# Altium PCB controlo_rev4.PcbDoc
Units mm, origin at the board's own origin, x right, y up, seen from the top; angles counter-clockwise.
Board outline 100.08 x 99.8 mm, 2 copper layers (Top Layer, Bottom Layer); 111 components, 133 nets, 412 pads, 259 vias.
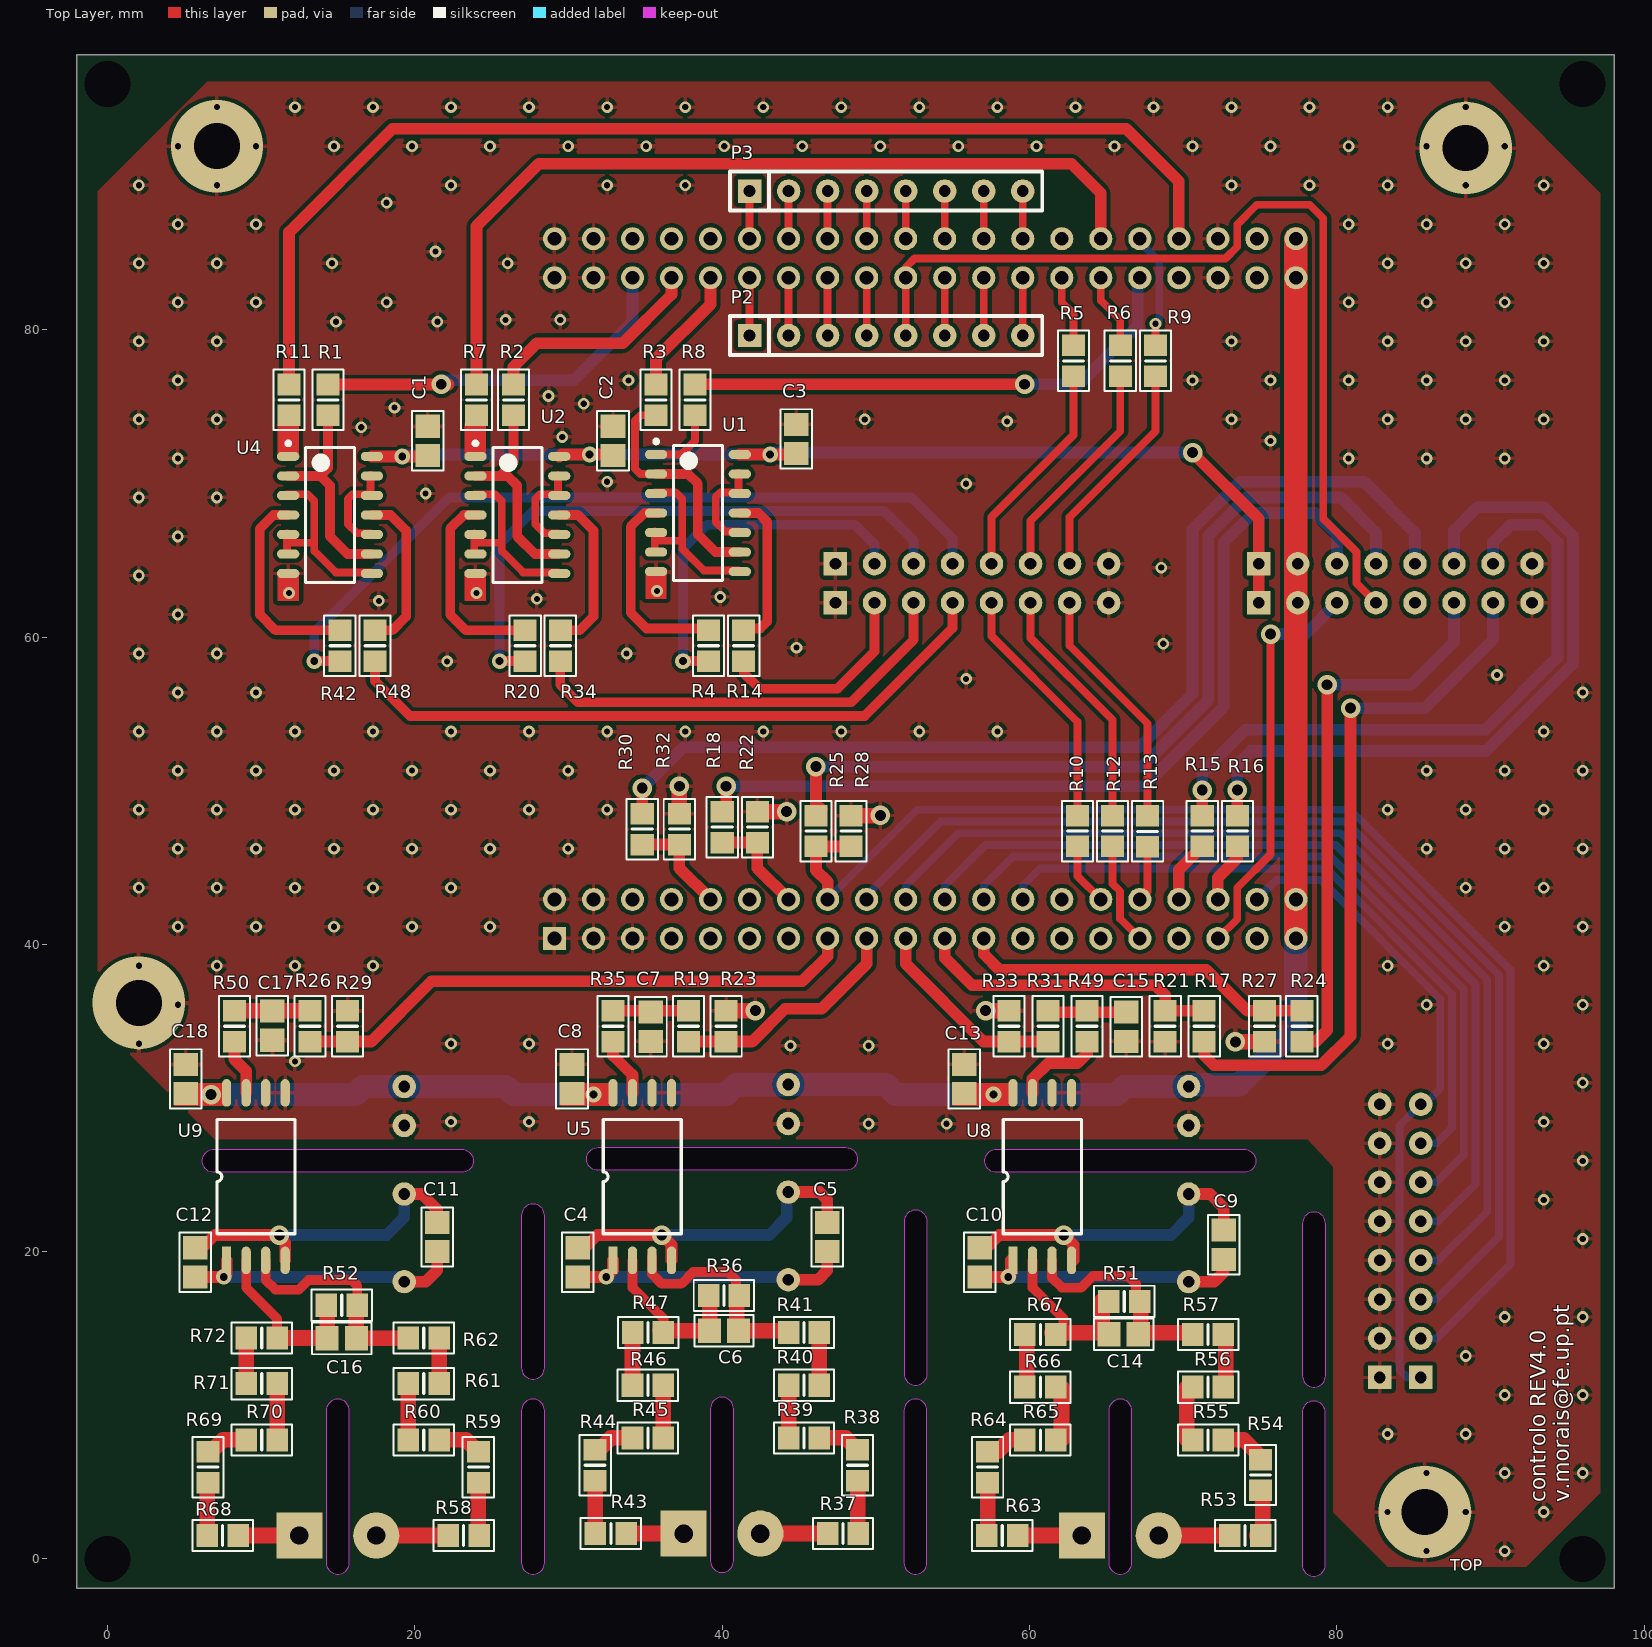
[diagram p0: Top Layer view]
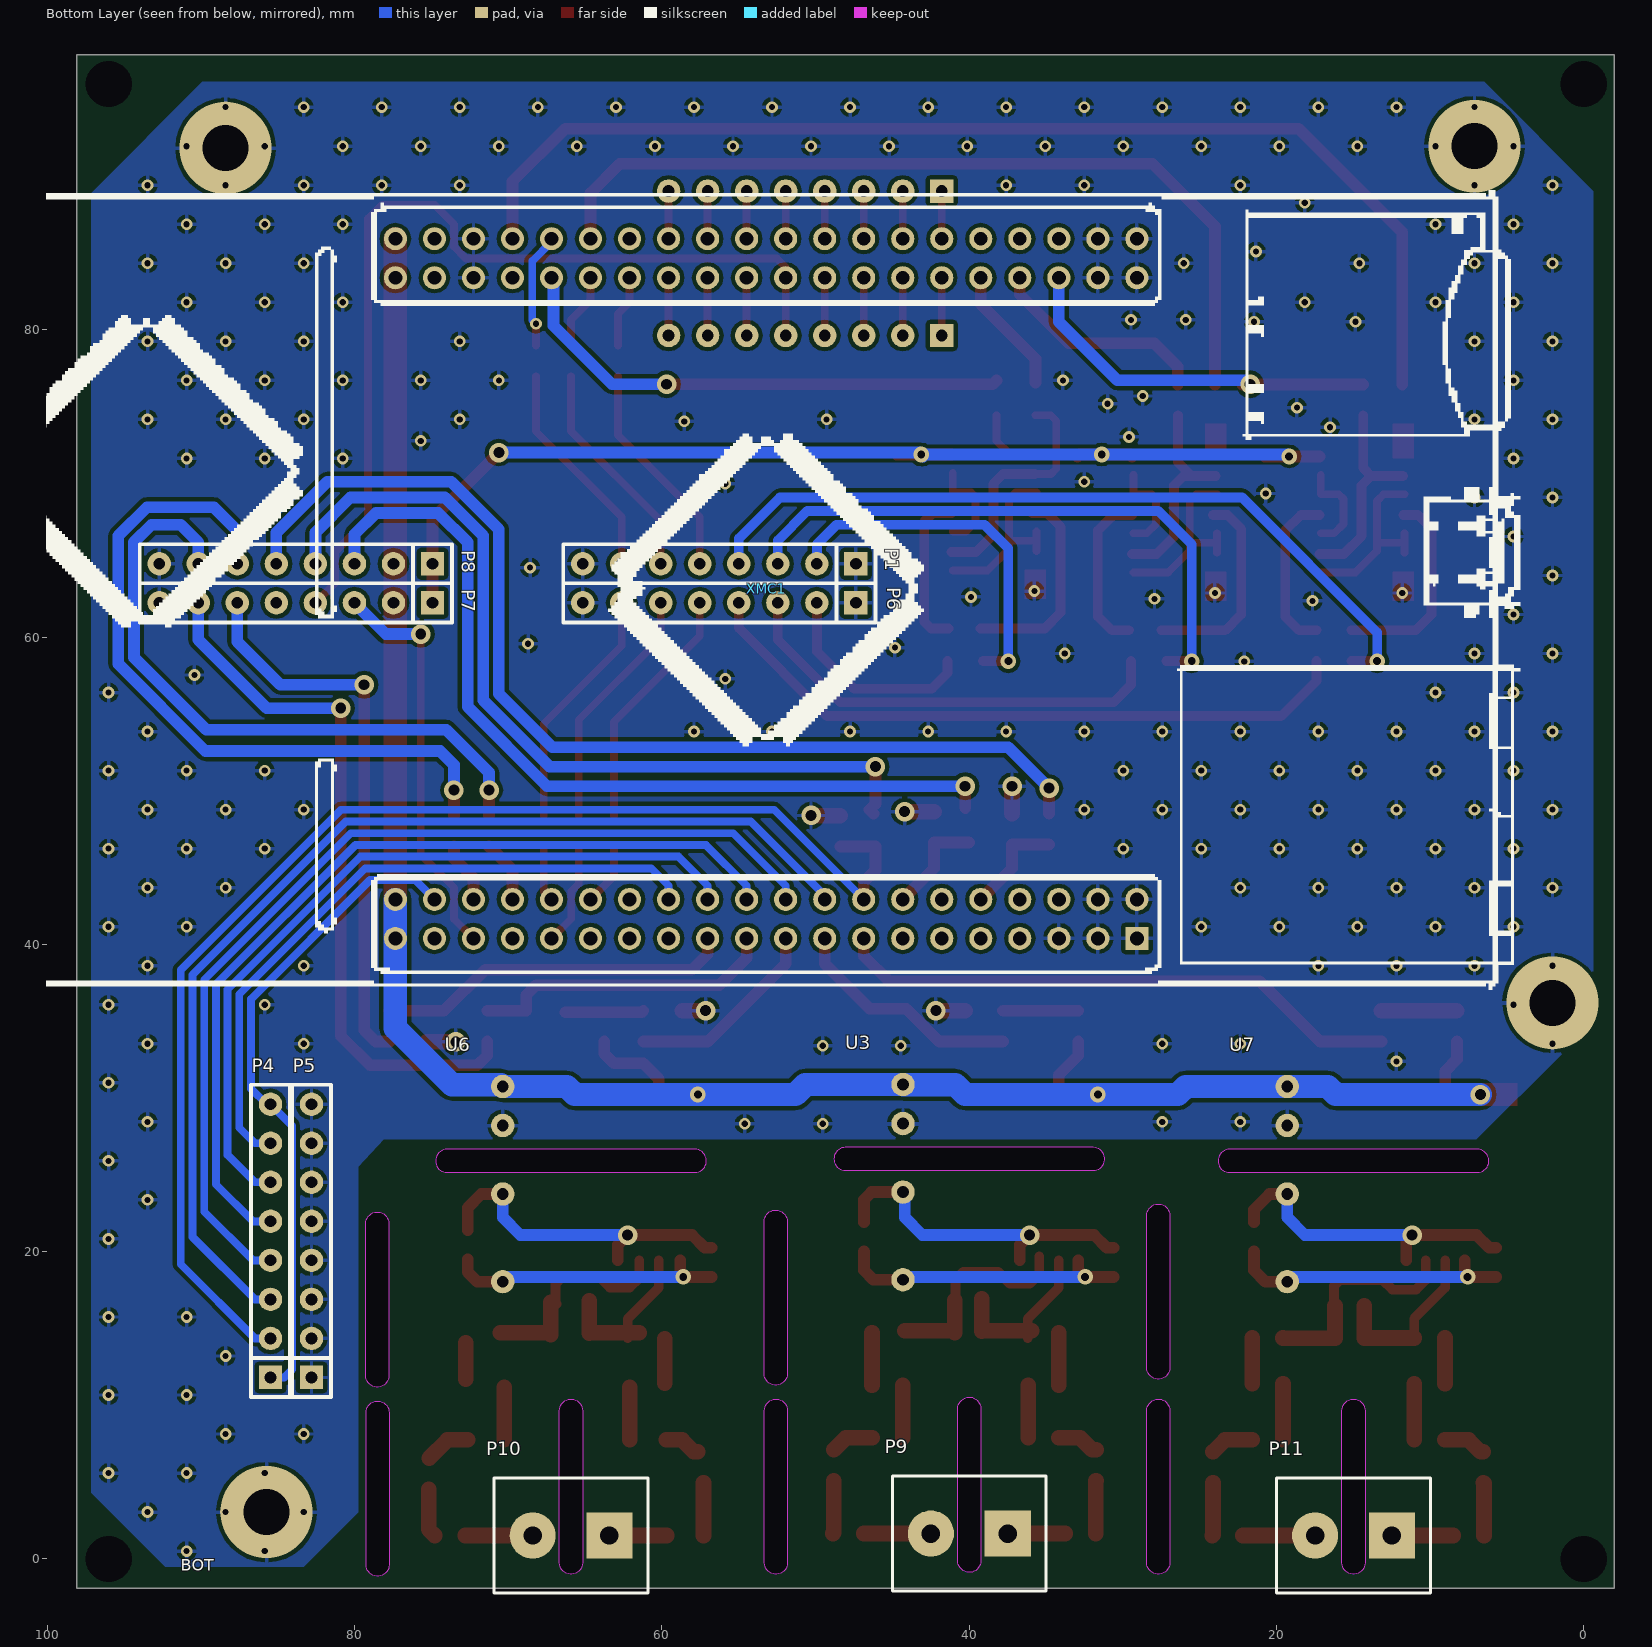
[diagram p1: Bottom Layer view, seen from below]

## Layer stack, top to bottom
Top Solder: solder mask 0.0102, Solder Resist, Dk 3.5
Top Layer: signal copper 0.0356
Dielectric 1: dielectric 0.32, FR-4, Dk 4.8
Bottom Layer: signal copper 0.0356
Bottom Solder: solder mask 0.0102, Solder Resist, Dk 3.5

## Board outline
-2,-1.905 20.447,-1.905 81.788,-1.905 98.075,-1.905 98.075,97.892 81.788,97.892 20.447,97.892 -2,97.892
cut-out: 14.236,-0.254 ccw(c14.986,-0.254) 15.736,-0.254 15.736,9.652 ccw(c14.986,9.652) 14.236,9.652
cut-out: 6.921,25.158 cw(c6.921,25.908) 6.921,26.658 23.051,26.658 cw(c23.051,25.908) 23.801,25.908 cw(c23.051,25.908) 23.051,25.158
cut-out: 26.936,12.446 ccw(c27.686,12.446) 28.436,12.446 28.436,22.352 ccw(c27.686,22.352) 26.936,22.352
cut-out: 26.936,-0.254 ccw(c27.686,-0.254) 28.436,-0.254 28.436,9.652 ccw(c27.686,9.652) 26.936,9.652
cut-out: 31.924,25.285 cw(c31.924,26.035) 31.924,26.785 48.053,26.785 cw(c48.053,26.035) 48.804,26.035 cw(c48.053,26.035) 48.053,25.285
cut-out: 39.239,-0.127 ccw(c39.989,-0.127) 40.739,-0.127 40.739,9.779 ccw(c39.989,9.779) 39.239,9.779
cut-out: 51.844,12.05 ccw(c52.594,12.05) 53.344,12.05 53.344,21.956 ccw(c52.594,21.956) 51.844,21.956
cut-out: 51.828,-0.254 ccw(c52.578,-0.254) 53.328,-0.254 53.328,9.652 ccw(c52.578,9.652) 51.828,9.652
cut-out: 57.848,25.158 cw(c57.848,25.908) 57.848,26.658 73.977,26.658 cw(c73.977,25.908) 74.728,25.908 cw(c73.977,25.908) 73.977,25.158
cut-out: 65.163,-0.254 ccw(c65.913,-0.254) 66.663,-0.254 66.663,9.652 ccw(c65.913,9.652) 65.163,9.652
cut-out: 77.768,11.923 ccw(c78.518,11.923) 79.268,11.923 79.268,21.829 ccw(c78.518,21.829) 77.768,21.829
cut-out: 77.752,-0.381 ccw(c78.502,-0.381) 79.252,-0.381 79.252,9.525 ccw(c78.502,9.525) 77.752,9.525

## Design rules (kind name [scope] priority, off if disabled: settings)
Clearance [All] p1: gap=0.254 ignorepadtopadclearanceinfootprint=FALSE
Height [All] p1: minheight=0 maxheight=254 prefheight=12.7
HoleSize [All] p1: absolutevalues=TRUE maxlimit=25.4 minlimit=0.025 maxpercent=80.000 minpercent=20.000
PlaneClearance [All] p1: clearance=2.54
PolygonConnect [All] p1: connectstyle=Relief reliefconductorwidth=0.254 reliefentries=4 polygonreliefangle="90 Angle" airgapwidth=0.254
RoutingVias [All] p1: holewidth=0.711 width=1.27 viastyle="Through Hole" minholewidth=0.711 minwidth=1.27 maxholewidth=0.711 maxwidth=1.27
SilkToSilkClearance [All] p1: silktosilkclearance=0.025
SilkToSolderMaskClearance [IsPad] p1: minsilkscreentomaskgap=0.025 clearancetoexposedcopper=TRUE
SolderMaskExpansion [All] p1: expansion=0.102
Width [All] p1: maxlimit=3.81 minlimit=0.254 preferedwidth=0.762
25 further rules are at their usual default settings.

## Components (designator, comment, footprint, x,y, rotation, side; value= is the part's Value field where it differs from the comment)
C1 "C 10uF 0805 MLCC 25V X5R" CAPC_0805 20.828,72.771 r270 top
C2 "C 10uF 0805 MLCC 25V X5R" CAPC_0805 32.893,72.771 r270 top
C3 "C 10uF 0805 MLCC 25V X5R" CAPC_0805 44.831,72.898 r270 top
C4 "C 10uF 0805 MLCC 25V X5R" CAPC_0805 30.607,19.304 r270 top
C5 "C 10uF 0805 MLCC 25V X5R" CAPC_0805 46.847,20.955 r270 top
C6 "C 1uF 0805 MLCC 50V X5R" CAPC_0805 40.116,14.859 r180 top
C7 "C 10nF 0805 MLCC 50V X7R" CAPC_0805 35.362,34.635 r90 top
C8 "C 10uF 0805 MLCC 25V X5R" CAPC_0805 30.226,31.242 r270 top
C9 "C 10uF 0805 MLCC 25V X5R" CAPC_0805 72.644,20.447 r270 top
C10 "C 10uF 0805 MLCC 25V X5R" CAPC_0805 56.769,19.304 r270 top
C11 "C 10uF 0805 MLCC 25V X5R" CAPC_0805 21.463,20.955 r270 top
C12 "C 10uF 0805 MLCC 25V X5R" CAPC_0805 5.715,19.304 r270 top
C13 "C 10uF 0805 MLCC 25V X5R" CAPC_0805 55.753,31.242 r270 top
C14 "C 1uF 0805 MLCC 50V X5R" CAPC_0805 66.131,14.619 r180 top
C15 "C 10nF 0805 MLCC 50V X7R" CAPC_0805 66.294,34.635 r90 top
C16 "C 1uF 0805 MLCC 50V X5R" CAPC_0805 15.24,14.351 r180 top
C17 "C 10nF 0805 MLCC 50V X7R" CAPC_0805 10.724,34.707 r90 top
C18 "C 10uF 0805 MLCC 25V X5R" CAPC_0805 5.08,31.242 r270 top
P1 "P 8p 2.54 SR DW 8P" "Header 8x1 8.5mm" 47.371,64.77 r0 bottom locked
P2 "P 8p 2.54 SR DW 8P" "Header 8x1 8.5mm" 41.783,79.629 r0 top
P3 "P 8p 2.54 SR DW 8P" "Header 8x1 8.5mm" 41.783,89.027 r0 top
P4 "P 8p 2.54 SR DW 8P" "Header 8x1 8.5mm" 85.471,11.811 r90 bottom
P5 "P 8p 2.54 SR DW 8P" "Header 8x1 8.5mm" 82.804,11.811 r90 bottom
P6 "P 8p 2.54 SR DW 8P" "Header 8x1 8.5mm" 47.371,62.23 r0 bottom locked
P7 "P 8p 2.54 SR DW 8P" "Header 8x1 8.5mm" 74.93,62.23 r0 bottom locked
P8 "P 8p 2.54 SR DW 8P" "Header 8x1 8.5mm" 74.93,64.77 r0 bottom locked
P9 "P 2p 5mm" connector1x2_parafuso 39.989,1.651 r0 bottom
P10 "P 2p 5mm" connector1x2_parafuso 65.913,1.524 r0 bottom
P11 "P 2p 5mm" connector1x2_parafuso 14.986,1.524 r0 bottom
R1 "R 0 1/8W 0805" RESC_0805 14.351,75.438 r90 top
R2 "R 0 1/8W 0805" RESC_0805 26.416,75.438 r90 top
R3 "R 0 1/8W 0805" RESC_0805 35.687,75.438 r90 top
R4 "R 0 1/8W 0805" RESC_0805 39.116,59.436 r270 top
R5 "R 0 1/8W 0805" RESC_0805 62.865,77.978 r90 top
R6 "R 0 1/8W 0805" RESC_0805 65.913,77.978 r90 top
R7 "R 0 1/8W 0805" RESC_0805 24.003,75.438 r270 top
R8 "R 0 1/8W 0805" RESC_0805 38.227,75.438 r90 top
R9 "R 0 1/8W 0805" RESC_0805 68.199,77.978 r90 top
R10 "R 0 1/8W 0805" RESC_0805 63.119,47.371 r90 top
R11 "R 0 1/8W 0805" RESC_0805 11.811,75.438 r270 top
R12 "R 0 1/8W 0805" RESC_0805 65.405,47.371 r270 top
R13 "R 0 1/8W 0805" RESC_0805 67.691,47.355 r90 top
R14 "R 0 1/8W 0805" RESC_0805 41.402,59.436 r270 top
R15 "R 0 1/8W 0805" RESC_0805 71.247,47.371 r90 top
R16 "R 0 1/8W 0805" RESC_0805 73.533,47.371 r90 top
R17 "R 5k1 1/8W 0805 .1%" RESC_0805 71.374,34.671 r270 top
R18 "R 5k1 1/8W 0805 .1%" RESC_0805 40.005,47.625 r90 top
R19 "R 5k1 1/8W 0805 .1%" RESC_0805 37.804,34.671 r90 top
R20 "R 0 1/8W 0805" RESC_0805 27.178,59.436 r270 top
R21 "R 7k5 1/8W 0805 .1%" RESC_0805 68.834,34.671 r90 top
R22 "R 7k5 1/8W 0805 .1%" RESC_0805 42.291,47.625 r270 top
R23 "R 7k5 1/8W 0805 .1%" RESC_0805 40.259,34.671 r270 top
R24 "R 5k1 1/8W 0805 .1%" RESC_0805 77.724,34.671 r270 top
R25 "R 5k1 1/8W 0805 .1%" RESC_0805 46.101,47.371 r90 top
R26 "R 5k1 1/8W 0805 .1%" RESC_0805 13.166,34.671 r90 top
R27 "R 7k5 1/8W 0805 .1%" RESC_0805 75.311,34.671 r90 top
R28 "R 7k5 1/8W 0805 .1%" RESC_0805 48.387,47.371 r270 top
R29 "R 7k5 1/8W 0805 .1%" RESC_0805 15.621,34.671 r270 top
R30 "R 5k1 1/8W 0805 .1%" RESC_0805 34.798,47.498 r90 top
R31 "R 5k1 1/8W 0805 .1%" RESC_0805 61.209,34.671 r90 top
R32 "R 7k5 1/8W 0805 .1%" RESC_0805 37.211,47.498 r270 top
R33 "R 7k5 1/8W 0805 .1%" RESC_0805 58.674,34.671 r270 top
R34 "R 0 1/8W 0805" RESC_0805 29.464,59.436 r270 top
R35 "R 330 1/8 0805 .1%" RESC_0805 32.893,34.671 r90 top
R36 "R 560 1/8W 0805 .1%" RESC_0805 40.116,17.145 r180 top
R37 "R 100k 1/8W 0805 .1%" RESC_0805 47.863,1.651 r0 top
R38 "R 100k 1/8W 0805 .1%" RESC_0805 48.813,6.096 r90 top
R39 "R 100k 1/8W 0805 .1%" RESC_0805 45.323,7.874 r180 top
R40 "R 100k 1/8W 0805 .1%" RESC_0805 45.323,11.303 r0 top
R41 "R 100k 1/8W 0805 .1%" RESC_0805 45.323,14.732 r180 top
R42 "R 0 1/8W 0805" RESC_0805 15.113,59.436 r270 top
R43 "R 100k 1/8W 0805 .1%" RESC_0805 32.75,1.651 r180 top
R44 "R 100k 1/8W 0805 .1%" RESC_0805 31.734,6.096 r90 top
R45 "R 100k 1/8W 0805 .1%" RESC_0805 35.163,7.874 r0 top
R46 "R 100k 1/8W 0805 .1%" RESC_0805 35.163,11.303 r180 top
R47 "R 100k 1/8W 0805 .1%" RESC_0805 35.179,14.732 r0 top
R48 "R 0 1/8W 0805" RESC_0805 17.399,59.436 r270 top
R49 "R 330 1/8 0805 .1%" RESC_0805 63.745,34.671 r90 top
R50 "R 330 1/8 0805 .1%" RESC_0805 8.255,34.671 r90 top
R51 "R 560 1/8W 0805 .1%" RESC_0805 66.167,16.764 r180 top
R52 "R 560 1/8W 0805 .1%" RESC_0805 15.24,16.51 r180 top
R53 "R 100k 1/8W 0805 .1%" RESC_0805 74.041,1.524 r0 top
R54 "R 100k 1/8W 0805 .1%" RESC_0805 75.041,5.461 r90 top
R55 "R 100k 1/8W 0805 .1%" RESC_0805 71.628,7.747 r180 top
R56 "R 100k 1/8W 0805 .1%" RESC_0805 71.628,11.176 r0 top
R57 "R 100k 1/8W 0805 .1%" RESC_0805 71.628,14.605 r180 top
R58 "R 100k 1/8W 0805 .1%" RESC_0805 23.176,1.524 r0 top
R59 "R 100k 1/8W 0805 .1%" RESC_0805 24.126,5.969 r90 top
R60 "R 100k 1/8W 0805 .1%" RESC_0805 20.574,7.747 r180 top
R61 "R 100k 1/8W 0805 .1%" RESC_0805 20.574,11.403 r0 top
R62 "R 100k 1/8W 0805 .1%" RESC_0805 20.574,14.378 r180 top
R63 "R 100k 1/8W 0805 .1%" RESC_0805 58.227,1.524 r180 top
R64 "R 100k 1/8W 0805 .1%" RESC_0805 57.277,5.969 r90 top
R65 "R 100k 1/8W 0805 .1%" RESC_0805 60.706,7.747 r0 top
R66 "R 100k 1/8W 0805 .1%" RESC_0805 60.706,11.176 r180 top
R67 "R 100k 1/8W 0805 .1%" RESC_0805 60.706,14.605 r0 top
R68 "R 100k 1/8W 0805 .1%" RESC_0805 7.489,1.524 r180 top
R69 "R 100k 1/8W 0805 .1%" RESC_0805 6.539,5.969 r90 top
R70 "R 100k 1/8W 0805 .1%" RESC_0805 10.033,7.747 r0 top
R71 "R 100k 1/8W 0805 .1%" RESC_0805 10.033,11.403 r180 top
R72 "R 100k 1/8W 0805 .1%" RESC_0805 10.033,14.378 r0 top
U1 "IC NAND HEF4011" SOIC-14N 38.423,68.072 r0 top
U2 "IC NAND HEF4011" SOIC-14N 26.67,67.945 r0 top
U3 "IC CC/CC 1W 5V" DC/DC_ISO 44.307,30.876 r270 bottom
U4 "IC NAND HEF4011" SOIC-14N 14.478,67.945 r0 top
U5 "IC AmpIso BIPOL AMC1200" SOIC8 32.893,19.431 r90 top
U6 "IC CC/CC 1W 5V" DC/DC_ISO 70.358,30.749 r270 bottom
U7 "IC CC/CC 1W 5V" DC/DC_ISO 19.304,30.749 r270 bottom
U8 "IC AmpIso BIPOL AMC1200" SOIC8 58.928,19.431 r90 top
U9 "IC AmpIso BIPOL AMC1200" SOIC8 7.747,19.431 r90 top
XMC1 "IC XMC4500 Relax LITE" XMC4500 53.213,63.156 r270 bottom locked

## Footprints (in the part's own frame and the unit in brackets; to place one, negate y for a bottom-side part, rotate by r counter-clockwise, add the part's x,y. Pads: shape width x height; smd on the part's side, far side on the other; paste and mask are expansions set on the pad)
CAPC_0805 [mm] "Chip Capacitor, Body 2.0x1.3mm, IPC Low Density"
  rect 1.5x1.6 smd: 1(-0.95,0) 2(0.95,0)
  silkscreen extent -1.93,-1.03 1.93,1.03, body extent -1.1,-0.72 1.1,0.72, height 1.1
connector1x2_parafuso [mm] "Connector; Header; 2 Position"
  rect 3x3 hole 1.2: 1(-2.5,0)
  round 3 hole 1.2: 2(2.5,0)
  silkscreen extent -5,-3.75 5,3.75, body extent -4.92,-4.53 5.68,4.47, height 14.6
DC/DC_ISO [mil]
  round 60 hole 30: 1(0,0) 2(100,0) 3(275.59,0) 4(500,0)
  body extent -54,-149 572,80, height 315
"Header 8x1 8.5mm" [mil] "Stackable 8 pin header"
  rect 60x60 hole 30: 1(0,0)
  round 60 hole 30: 2(100,0) 3(200,0) 4(300,0) 5(400,0) 6(500,0) 7(600,0) 8(700,0)
  silkscreen extent -50,-50 750,50, body extent -50,-50 750,50, height 335
RESC_0805 [mm] "Chip Resistor, Body 2.0x1.3mm, IPC Low Density"
  rect 1.4x1.5 smd: 1(-1,0) 2(1,0)
  silkscreen extent -1.96,-1.01 1.96,1.01, body extent -1.07,-0.7 1.08,0.7, height 0.65
SOIC8 [mm]
  rect 1.8x0.6 smd: 1(0,0)
  oval 1.8x0.6 smd: 2(0,-1.27) 3(0,-2.54) 4(0,-3.81) 5(10.9,-3.81) 6(10.9,-2.54) 7(10.9,-1.27) 8(10.9,0)
  silkscreen extent 1.73,-4.44 9.17,0.64, body extent 1.7,-4.52 9.22,0.69, height 3
SOIC-14N [mm] "SOIC, 14-Leads, Body 8,65x3,90mm, Pitch 1,27mm, IPC Medium Density"
  oval 1.45x0.6 smd: 1(-2.725,3.81) 2(-2.725,2.54) 3(-2.725,1.27) 4(-2.725,0) 5(-2.725,-1.27) 6(-2.725,-2.54) 7(-2.725,-3.81) 8(2.725,-3.81) 9(2.725,-2.54) 10(2.725,-1.27) 11(2.725,0) 12(2.725,1.27) 13(2.725,2.54) 14(2.725,3.81)
  silkscreen extent -2.85,-4.4 1.6,4.78, body extent -2,-4.4 2,4.4, height 1.75
XMC4500 [mm]
  rect 1.5x1.5 hole 0.9: 1(22.77,24.13)
  round 1.5 hole 0.9: 2(22.77,21.59) 3(22.77,19.05) 4(22.77,16.51) 5(22.77,13.97) 6(22.77,11.43) 7(22.77,8.89) 8(22.77,6.35) 9(22.77,3.81) 10(22.77,1.27) 11(22.77,-1.27) 12(22.77,-3.81) 13(22.77,-6.35) 14(22.77,-8.89) 15(22.77,-11.43) 16(22.77,-13.97) 17(22.77,-16.51) 18(22.77,-19.05) 19(22.77,-21.59) 20(22.77,-24.13) 21(20.23,-24.13) 22(20.23,-21.59) 23(20.23,-19.05) 24(20.23,-16.51) 25(20.23,-13.97) 26(20.23,-11.43) 27(20.23,-8.89) 28(20.23,-6.35) 29(20.23,-3.81) 30(20.23,-1.27) 31(20.23,1.27) 32(20.23,3.81) 33(20.23,6.35) 34(20.23,8.89) 35(20.23,11.43) 36(20.23,13.97) 37(20.23,16.51) 38(20.23,19.05) 39(20.23,21.59) 40(20.23,24.13) 41(-20.23,24.13) 42(-20.23,21.59) 43(-20.23,19.05) 44(-20.23,16.51) 45(-20.23,13.97) 46(-20.23,11.43) 47(-20.23,8.89) 48(-20.23,6.35) 49(-20.23,3.81) 50(-20.23,1.27) 51(-20.23,-1.27) 52(-20.23,-3.81) 53(-20.23,-6.35) 54(-20.23,-8.89) 55(-20.23,-11.43) 56(-20.23,-13.97) 57(-20.23,-16.51) 58(-20.23,-19.05) 59(-20.23,-21.59) 60(-20.23,-24.13) 61(-22.77,-24.13) 62(-22.77,-21.59) 63(-22.77,-19.05) 64(-22.77,-16.51) 65(-22.77,-13.97) 66(-22.77,-11.43) 67(-22.77,-8.89) 68(-22.77,-6.35) 69(-22.77,-3.81) 70(-22.77,-1.27) 71(-22.77,1.27) 72(-22.77,3.81) 73(-22.77,6.35) 74(-22.77,8.89) 75(-22.77,11.43) 76(-22.77,13.97) 77(-22.77,16.51) 78(-22.77,19.05) 79(-22.77,21.59) 80(-22.77,24.13)
  silkscreen extent -25.92,-53.34 26.1,49.07, body extent -24.04,-25.4 24.04,25.4, height 8.5

## Part data
C1 C2 C3 C4 C5 C8 C9 C10 C11 C12 C13 C18: library part "Capacitor SMD", "Capacitores de cerâmica multicamada MLCC - SMD/SMT 10uF 25V X5R +/-10% 0805 Gen Purp", LCSC PART #=C15850, Mouser VPN=963-TMK212BBJ106KG-T, Price=0,162
C6 C14 C16: library part "Capacitor SMD", "Capacitores de cerâmica multicamada MLCC - SMD/SMT 0805 50V 1uF 20% X5R", LCSC PART #=C28323, Mouser VPN=963-UMK212BJ105MG-T, Price=0,153
C7 C15 C17: library part "Capacitor SMD", "Capacitores de cerâmica multicamada MLCC - SMD/SMT 10nF 50V X7R 10%", LCSC PART #=C1710, Mouser VPN=603-CC805KRX7R9BB103, Price=0,099
P1 P2 P3 P4 P5 P6 P7 P8: library part jumper_8p, "Distribuidores e Alojamento de Fios CGrid Hrd SRDW THo le 8ckt", Mouser VPN=538-87937-0800, Price=0,621
P9 P10 P11: library part gen_purpose_conn_1x2, "Bloques de terminales de PCB de perfil estándar RS de 5,0 mm", Price=0,24, RS VPN=896-6696
R1 R2 R3 R4 R5 R6 R7 R8 R9 R10 R11 R12 R13 R14 R15 R16 R20 R34 R42 R48: library part Resistor, "Resistores de Filme Espesso - SMD 1/8Watt 0ohms Commercial Use", LCSC PART #=C17477, Mouser VPN=71-CRCW08050000Z0EAC, Price=0,09
R17 R18 R19 R24 R25 R26 R30 R31: library part Resistor, "Resistores de Filme Fino - SMD 0805 5.1Kohm 1/8W .1% 25ppm", LCSC PART #=C27834, Mouser VPN=667-ERA-6AEB512V, Price=0,324
R21 R22 R23 R27 R28 R29 R32 R33: library part Resistor, "Resistores de Filme Fino - SMD 7.5K OHM .1% 25ppm", LCSC PART #=C17807, Mouser VPN=66-PCF08C7.5KB, Price=0,135
R35 R49 R50: library part Resistor, "Resistores de Filme Fino - SMD CPF 0805 330R 0.1% 25PPM 1K RL", LCSC PART #=C17630, Mouser VPN=279-CPF0805B330RE1, Price=0,126
R36 R51 R52: library part Resistor, "Resistores de Filme Fino - SMD 1/8W 3.6K ohm .1% 25ppm", LCSC PART #=C28636, Mouser VPN=667-ERJ-PB6B5600V, Price=0,324
R37 R38 R39 R40 R41 R43 R44 R45 R46 R47 R53 R54 R55 R56 R57 R58 R59 R60 R61 R62 R63 R64 R65 R66 R67 R68 R69 R70 R71 R72: library part Resistor, "Resistores de Filme Fino - SMD 100 Kohm .1% 0805 25PPM", LCSC PART #=C17407, Mouser VPN=284-APC0805B100KN, Price=0,126
U1 U2 U4: library part HEF4011, "Portas lógicas QUADRUPLE 2-INPUT NAND GATE", LCSC PART #=C6725, Mouser VPN=771-HEF4011BTD-T, Price=0,296
U3 U6 U7: library part DC/DC_ISO, "Conversores CC/CC com isolação 1W 5Vin 5Vout 200mA SIP7", Mouser VPN=919-RFB-0505S, Price=1,4
U5 U8 U9: library part AMC1200, "Amplificadores de isolamento 4kV peak Iso Amp", LCSC PART #=C79905, Mouser VPN=595-AMC1200BDWVR, Price=4,62
XMC1: library part XMC4500, "\"  KIT_XMC45_RELAX_LITE_V1 -  Evaluation Board, XMC4500 MCU, Detachable On-Board Debugger, USB Powered \"", Farnell VPN=2443552, Price=14,628, RS VPN=251-8418

## Free pads (board coordinates)
  round 1.524 hole 3 unplated: 4(0,0) 4(0,96) 4(96,0) 4(96,96)

## Via types
v1: diameter 0.762, hole 0.4, Top Layer to Bottom Layer, 223 vias
v2: diameter 1.27, hole 0.711, Top Layer to Bottom Layer, 21 vias
v3: diameter 1.016, hole 0.508, Top Layer to Bottom Layer, 11 vias
v4: diameter 6, hole 3, Top Layer to Bottom Layer, 4 vias

## Nets (pads, with @x,y where several pads share a name; then routed paths per layer and width w, separated by ;. In a path a pad name is that pad's centre, name@x,y a point inside that pad or via, vN(x,y) a via of type N, cw(c..) or ccw(c..) an arc to the next point about the centre after c; other vN are vias at no path point)
3V3: C1.2 C2.2 C3.2 P7.1 P8.1 U1.14 U2.14 U4.14 | length 74.3
  Top Layer w0.762: U4.14 v3(19.177,71.755) 20.762,71.755 C1.2 ; U2.14 29.522,71.882 v3(31.369,71.882) 32.827,71.882 32.954,71.755 C2.2@33.02,71.821 ; U1.14 v3(43.122,71.882) 44.707,71.882 C3.2@44.773,71.948 ; v2(70.612,72.009) 74.93,67.691 P8.1 P7.1
  Bottom Layer w0.762: v3(19.177,71.755) 19.304,71.882 v3(31.369,71.882) 42.868,71.882 42.995,71.755 v3(43.122,71.882) 43.249,72.009 v2(70.612,72.009)
3V3GND: C1.1 C2.1 C3.1 C7.1 C8.1 C13.1 C15.1 C17.1 C18.1 P1.1 P1.8 P5.1 P5.2 P5.3 P5.4 P5.5 P5.6 P5.7 P5.8 P6.1 P6.8 P7.8 P8.8 R21.1 R22.1 R23.1 R27.1 R28.1 R29.1 R32.1 R33.1 U1.7 U2.7 U3.2 U4.7 U5.5 U5.6 U6.2 U7.2 U8.5 U8.6 U9.5 U9.6 XMC1.1 XMC1.2 XMC1.3 XMC1.39 XMC1.40 XMC1.41 XMC1.42 XMC1.58 XMC1.63 XMC1.79 XMC1.80 | length 10.9
  Top Layer w1.016: R32.1 v2(37.211,50.292) ; R23.1 42.148,35.671 v2(42.164,35.687) ; R22.1 v2@44.18,48.625 ; R28.1 v2@50.276,48.371 ; v2(57.15,35.687) 57.166,35.671 R33.1 ; v2(73.406,33.655) 73.422,33.671 R27.1
  other v1: 85.852,0.508 90.932,0.508 83.312,3.048 88.392,3.048 93.472,3.048 85.852,5.588 90.932,5.588 96.012,5.588 83.312,8.128 88.392,8.128 90.932,10.668 96.012,10.668 88.392,13.208 90.932,15.748 96.012,15.748 96.012,20.828 93.472,23.368 96.012,25.908 49.53,28.321 54.61,28.321 22.352,28.448 27.432,28.448 93.472,28.448 96.012,30.988 12.192,32.385 44.45,33.401 49.53,33.401 2.032,33.528 22.352,33.528 27.432,33.528 83.312,33.528 93.472,33.528 4.572,36.068 85.852,36.068 96.012,36.068 2.032,38.608 7.112,38.608 12.192,38.608 17.272,38.608 83.312,38.608 93.472,38.608 4.572,41.148 9.652,41.148 14.732,41.148 19.812,41.148 24.892,41.148 90.932,41.148 96.012,41.148 2.032,43.688 7.112,43.688 12.192,43.688 17.272,43.688 22.352,43.688 88.392,43.688 93.472,43.688 4.572,46.228 9.652,46.228 14.732,46.228 19.812,46.228 24.892,46.228 29.972,46.228 85.852,46.228 90.932,46.228 96.012,46.228 2.032,48.768 7.112,48.768 12.192,48.768 17.272,48.768 22.352,48.768 27.432,48.768 32.512,48.768 83.312,48.768 88.392,48.768 93.472,48.768 4.572,51.308 9.652,51.308 14.732,51.308 19.812,51.308 24.892,51.308 29.972,51.308 85.852,51.308 90.932,51.308 96.012,51.308 2.032,53.848 7.112,53.848 12.192,53.848 17.272,53.848 22.352,53.848 27.432,53.848 32.512,53.848 37.592,53.848 42.672,53.848 47.752,53.848 52.832,53.848 57.912,53.848 93.472,53.848 4.572,56.388 9.652,56.388 96.012,56.388 55.88,57.277 90.424,57.531 22.098,58.42 2.032,58.928 7.112,58.928 33.782,58.928 44.831,59.309 68.707,59.563 4.572,61.468 17.653,62.357 27.94,62.484 39.878,62.611 11.811,62.865 24.003,62.865 35.756,62.992 2.032,64.008 68.58,64.516 4.572,66.548 2.032,69.088 7.112,69.088 20.701,69.342 55.88,69.977 32.512,70.104 4.572,71.628 80.772,71.628 85.852,71.628 90.932,71.628 75.692,72.771 29.591,73.025 16.51,73.66 58.547,74.041 2.032,74.168 7.112,74.168 49.276,74.168 73.152,74.168 83.312,74.168 88.392,74.168 93.472,74.168 18.669,74.93 30.988,75.184 28.702,75.692 4.572,76.708 33.896,76.708 70.612,76.708 75.692,76.708 80.772,76.708 85.852,76.708 90.932,76.708 2.032,79.248 7.112,79.248 73.152,79.248 83.312,79.248 88.392,79.248 93.472,79.248 14.859,80.518 21.463,80.518 25.908,80.645 29.464,80.645 4.572,81.788 9.652,81.788 18.161,81.788 80.772,81.788 85.852,81.788 90.932,81.788 2.032,84.328 7.112,84.328 14.605,84.328 26.035,84.328 83.312,84.328 88.392,84.328 93.472,84.328 21.336,85.09 4.572,86.868 9.652,86.868 80.772,86.868 85.852,86.868 90.932,86.868 18.161,88.265 2.032,89.408 7.112,89.408 22.352,89.408 32.512,89.408 37.592,89.408 73.152,89.408 78.232,89.408 83.312,89.408 88.392,89.408 93.472,89.408 4.572,91.948 9.652,91.948 14.732,91.948 19.812,91.948 24.892,91.948 29.972,91.948 35.052,91.948 40.132,91.948 45.212,91.948 50.292,91.948 55.372,91.948 60.452,91.948 65.532,91.948 70.612,91.948 75.692,91.948 80.772,91.948 85.852,91.948 90.932,91.948 7.112,94.488 12.192,94.488 17.272,94.488 22.352,94.488 27.432,94.488 32.512,94.488 37.592,94.488 42.672,94.488 47.752,94.488 52.832,94.488 57.912,94.488 62.992,94.488 68.072,94.488 73.152,94.488 78.232,94.488 83.312,94.488 88.392,94.488
  other v2: 50.292,48.387 44.196,48.641
  other v4: 85.725,3.048 2.032,36.195 88.392,91.821 7.112,91.948
5V: C8.2 C13.2 C18.2 P7.2 P8.2 U3.1 U5.8 U6.1 U7.1 U8.8 U9.8 XMC1.20 XMC1.21 XMC1.60 XMC1.61 | length 127.3
  Top Layer w1.524: XMC1.20 XMC1.21 XMC1.60 XMC1.61
  Bottom Layer w1.524: v2(6.731,30.226) 16.129,30.226 16.652,30.749 U7.1 25.893,30.749 26.416,30.226 40.259,30.226 40.894,30.861 44.292,30.861 U3.1 50.658,30.876 51.308,30.226 65.659,30.226 66.182,30.749 U6.1 70.47,30.861 73.66,30.861 77.343,34.544 XMC1.20 XMC1.21@77.343,42.914
  other v3: 31.623,30.226 57.658,30.226
ENA_U: R1.1 U4.2 U4.9 | length 13.7
  Top Layer w0.635: U4.2 13.843,70.485 ; R1.1 14.351,70.993 13.843,70.485 ; U4.9 15.621,65.405 14.471,66.555 14.471,69.857 13.843,70.485
ENA_V: R2.1 U2.2 U2.9 | length 15.4
  Top Layer w0.635: R2.1 26.416,71.374 25.527,70.485 U2.2 26.035,70.485 26.663,69.857 26.663,66.555 27.813,65.405 U2.9
ENA_W: R3.1 U1.2 U1.9 | length 15.6
  Top Layer w0.508: R3.1 34.687,74.438 34.328,74.079 34.328,70.955 34.671,70.612 U1.2
  Top Layer w0.635: U1.2 37.788,70.612 38.416,69.984 38.416,66.682 39.566,65.532 U1.9
Gnd1: C9.1 C10.1 U6.3 U8.4 | length 21.8
  Top Layer w0.762: C10.1 57.211,20.254 58.039,21.082 v2@62.103,21.082 ; v2(62.23,21.082) 62.865,20.447 U8.4@62.865,19.431 ; U6.3 71.755,23.749 72.644,22.86 C9.1
  Bottom Layer w0.762: v2(62.23,21.082) 69.215,21.082 70.358,22.225 U6.3
Gnd2: C11.1 C12.1 U7.3 U9.4 | length 20.4
  Top Layer w0.762: C12.1 6.157,20.254 6.985,21.082 v2@11.049,21.082 ; U9.4 11.557,20.574 ; U7.3 20.447,23.749 21.463,22.733 C11.1
  Bottom Layer w0.762: v2(11.176,21.082) 18.161,21.082 19.304,22.225 U7.3
Gnd3: C4.1 C5.1 U3.3 U5.4 | length 21.9
  Top Layer w0.762: C4.1 31.049,20.254 31.877,21.082 v2@35.941,21.082 ; v2(36.068,21.082) 36.703,20.447 U5.4 ; U3.3 46.355,23.876 46.847,23.384 C5.1
  Bottom Layer w0.762: v2(36.068,21.082) 43.053,21.082 44.196,22.225 U3.3@44.196,23.749
I_U: P8.5 R30.2 | length 69.9
  Top Layer w0.762: R30.2 v2(34.798,50.165)
  Bottom Layer w0.762: v2(34.798,50.165) 37.465,52.832 67.143,52.832 70.612,56.301 70.612,67.009 73.707,70.104 81.788,70.104 85.09,66.802 P8.5
I_V: P8.4 R25.2 | length 56.3
  Top Layer w0.762: v2(46.101,51.562) 46.101,49.133 46.482,48.752 R25.2@46.228,48.498
  Bottom Layer w0.762: v2(46.101,51.562) 67.31,51.562 71.628,55.88 71.628,66.588 74.128,69.088 80.264,69.088 82.55,66.802 P8.4
I_W: P8.3 R18.2 | length 57.3
  Top Layer w0.762: R18.2@40.259,48.879 v2(40.259,50.292)
  Bottom Layer w0.762: v2(40.259,50.292) 67.477,50.292 72.644,55.459 72.644,66.167 74.549,68.072 78.613,68.072 80.01,66.675 P8.3
iabc_0: R30.1 R32.2 XMC1.36 | length 6.8
  Top Layer w0.762: R30.1 R32.2 37.211,44.958 XMC1.36
iabc_1: P4.2 R25.1 R28.2 XMC1.33 | length 84.2
  Top Layer w0.762: XMC1.33 46.863,44.069 46.101,44.831 R25.1 R28.2
  Bottom Layer w0.508: XMC1.33 52.693,48.756 80.887,48.756 91.313,38.33 91.313,19.177 86.487,14.351 P4.2
iabc_2: R18.1 R22.2 XMC1.34 | length 6.7
  Top Layer w0.762: R18.1 R22.2 ; R22.2@42.291,46.498 42.291,44.958 XMC1.34
iso_ENA_UH: P1.7 R9.1 | length 14.5
  Top Layer w0.508: P1.7 62.611,67.818 68.199,73.406 R9.1
iso_ENA_UL: P6.7 R13.2 | length 16
  Top Layer w0.508: P6.7 62.611,59.436 67.691,54.356 R13.2
iso_ENA_VH: P1.6 R6.1 | length 14.6
  Top Layer w0.508: P1.6 60.071,67.564 65.913,73.406 R6.1
iso_ENA_VL: P6.6 R12.1 | length 16.1
  Top Layer w0.508: P6.6 60.071,59.944 65.405,54.61 R12.1
iso_ENA_WH: P1.5 R5.1 | length 14.4
  Top Layer w0.508: P1.5 57.531,67.818 62.865,73.152 R5.1
iso_ENA_WL: P6.5 R10.2 | length 16.2
  Top Layer w0.508: P6.5 57.531,60.071 63.119,54.483 R10.2
iso_PWM_UH: P1.4 R42.2 | length 51.5
  Top Layer w0.635: v3(13.446,58.436) R42.2
  Bottom Layer w0.635: v3(13.446,58.436) 13.446,60.309 22.225,69.088 52.324,69.088 54.991,66.421 P1.4
iso_PWM_UL: P6.4 R48.2 | length 43.8
  Top Layer w0.635: R48.2 17.399,57.15 19.685,54.864 49.276,54.864 54.991,60.579 P6.4
iso_PWM_VH: P1.3 R20.2 | length 39.4
  Top Layer w0.635: v3(25.511,58.436) R20.2
  Bottom Layer w0.635: v3(25.511,58.436) 25.511,66.024 27.686,68.199 50.546,68.199 52.451,66.294 P1.3
iso_PWM_VL: P6.3 R34.2 | length 29.1
  Top Layer w0.635: R34.2 29.464,56.896 30.607,55.753 48.387,55.753 52.451,59.817 P6.3
iso_PWM_WH: P1.2 R4.2 | length 23.9
  Top Layer w0.635: v3(37.449,58.436) R4.2
  Bottom Layer w0.635: v3(37.449,58.436) 37.449,65.77 38.989,67.31 48.641,67.31 49.911,66.04 P1.2
iso_PWM_WL: P6.2 R14.2 | length 13.9
  Top Layer w0.635: R14.2 41.402,57.658 42.418,56.642 47.498,56.642 49.911,59.055 P6.2
NetP2_1: P2.1 XMC1.46 | length 3.8
  Top Layer w0.508: P2.1 XMC1.46
NetP2_2: P2.2 XMC1.47 | length 3.8
  Top Layer w0.508: P2.2 XMC1.47
NetP2_3: P2.3 XMC1.48 | length 3.8
  Top Layer w0.508: P2.3 XMC1.48
NetP2_4: P2.4 XMC1.49 | length 3.8
  Top Layer w0.508: P2.4 XMC1.49
NetP2_6: P2.6 XMC1.51 | length 3.8
  Top Layer w0.508: P2.6 XMC1.51
NetP2_7: P2.7 XMC1.52 | length 3.8
  Top Layer w0.508: P2.7 XMC1.52
NetP2_8: P2.8 XMC1.53 | length 3.8
  Top Layer w0.508: P2.8 XMC1.53
NetP3_1: P3.1 XMC1.75 | length 3.1
  Top Layer w0.508: XMC1.75 P3.1
NetP3_2: P3.2 XMC1.74 | length 3.1
  Top Layer w0.508: XMC1.74 P3.2
NetP3_3: P3.3 XMC1.73 | length 3.1
  Top Layer w0.508: XMC1.73 P3.3
NetP3_4: P3.4 XMC1.72 | length 3.1
  Top Layer w0.508: XMC1.72 P3.4
NetP3_5: P3.5 XMC1.71 | length 3.1
  Top Layer w0.508: XMC1.71 P3.5
NetP3_6: P3.6 XMC1.70 | length 3.1
  Top Layer w0.508: XMC1.70 P3.6
NetP3_7: P3.7 XMC1.69 | length 3.1
  Top Layer w0.508: XMC1.69 P3.7
NetP3_8: P3.8 XMC1.68 | length 3.1
  Top Layer w0.508: XMC1.68 P3.8
NetP4_1: P4.1 P4.8 XMC1.22 | length 42.6
  Bottom Layer w0.508: XMC1.22 76.061,44.184 78.993,44.184 86.741,36.436 86.741,30.607 85.725,29.591 P4.8 84.074,28.194 84.074,12.319 84.582,11.811 P4.1
NetP4_3: P4.3 XMC1.32 | length 71.4
  Bottom Layer w0.508: XMC1.32 49.403,43.18 54.217,47.994 80.571,47.994 90.551,38.014 90.551,20.955 86.487,16.891 P4.3
NetP4_4: P4.4 XMC1.31 | length 64.8
  Bottom Layer w0.508: XMC1.31 51.943,43.815 55.36,47.232 80.256,47.232 89.789,37.699 89.789,22.606 86.614,19.431 P4.4
NetP4_5: P4.5 XMC1.30 | length 57.9
  Bottom Layer w0.508: XMC1.30 54.483,43.815 57.138,46.47 79.94,46.47 89.027,37.383 89.027,24.384 86.614,21.971 P4.5
NetP4_6: P4.6 XMC1.29 | length 50.8
  Bottom Layer w0.508: XMC1.29 57.023,43.815 58.916,45.708 79.624,45.708 88.265,37.067 88.265,26.289 86.487,24.511 P4.6
NetP4_7: P4.7 XMC1.28 | length 43.8
  Bottom Layer w0.508: XMC1.28 59.563,43.815 60.694,44.946 79.309,44.946 87.503,36.752 87.503,28.067 86.487,27.051 P4.7
NetP9_1: P9.1 R43.1 | length 3.7
  Top Layer w1.016: R43.1 P9.1
NetP9_2: P9.2 R37.1 | length 4.4
  Top Layer w1.016: P9.2 R37.1
NetP10_1: P10.1 R63.1 | length 3.7
  Top Layer w1.016: R63.1@59.674,1.524 P10.1
NetP10_2: P10.2 R53.1 | length 4.4
  Top Layer w1.016: P10.2 R53.1@72.787,1.524
NetP11_1: P11.1 R68.1 | length 4
  Top Layer w1.016: R68.1 P11.1
NetP11_2: P11.2 R58.1 | length 4.7
  Top Layer w1.016: P11.2 R58.1
NetR1_2: R1.2 XMC1.43 | length 25.4
  Top Layer w0.762: R1.2 22.209,76.438 22.193,76.454 v2(21.717,76.454)
  Bottom Layer w0.762: v2(21.717,76.454) 21.971,76.708 30.353,76.708 34.163,80.518 XMC1.43
NetR2_2: R2.2 XMC1.44 | length 14.5
  Top Layer w0.762: R2.2 26.416,77.597 27.94,79.121 33.528,79.121 36.703,82.296 XMC1.44
NetR3_2: R3.2 XMC1.45 | length 8.3
  Top Layer w0.762: R3.2@35.687,76.565 35.687,78.105 39.243,81.661 XMC1.45
NetR4_1: R4.1 U1.4 | length 13.4
  Top Layer w0.635: U1.4@35.894,68.072 34.936,68.072 34.047,67.183 34.047,61.595 35.079,60.563 R4.1@39.254,60.563
NetR5_2: R5.2 XMC1.54 | length 4.7
  Top Layer w0.508: XMC1.54 62.103,81.788 62.865,81.026 R5.2
NetR6_2: R6.2 XMC1.55 | length 4.9
  Top Layer w0.508: XMC1.55 64.643,81.915 65.913,80.645 R6.2
NetR7_1: R7.1 XMC1.66 | length 56.4
  Top Layer w0.762: R7.1 24.003,86.741 28.067,90.805 62.738,90.805 64.643,88.9 XMC1.66
NetR8_2: R8.2 XMC1.56 | length 33.7
  Top Layer w0.762: R8.2@38.227,76.692 38.465,76.454 v2(59.69,76.454)
  Bottom Layer w0.762: v2(59.69,76.454) 63.246,76.454 67.056,80.264 67.056,83.259 XMC1.56
NetR9_2: R9.2 XMC1.65 | length 7.6
  Top Layer w0.508: R9.2 v1(68.199,80.391)
  Bottom Layer w0.508: XMC1.65 67.183,85.725 68.441,84.467 68.441,80.633 v1(68.199,80.391)
NetR10_1: R10.1 XMC1.26 | length 4.1
  Top Layer w0.508: R10.1 63.119,44.45 XMC1.26
NetR11_1: R11.1 XMC1.64 | length 75.8
  Top Layer w0.762: R11.1 11.811,86.36 18.542,93.091 66.294,93.091 69.723,89.662 XMC1.64
NetR12_2: R12.2 XMC1.16 | length 6.7
  Top Layer w0.508: R12.2 65.405,43.943 65.901,43.447 65.901,41.668 XMC1.16
NetR13_1: R13.1 XMC1.25 | length 3.6
  Top Layer w0.508: XMC1.25 67.691,43.434 R13.1
NetR14_1: R14.1 U1.11 | length 10.3
  Top Layer w0.635: U1.11 42.36,68.072 42.926,67.506 42.926,61.018 42.471,60.563 R14.1@41.344,60.563
NetR15_1: R15.1 XMC1.24 | length 4.1
  Top Layer w0.762: XMC1.24 69.723,44.847 R15.1
NetR16_1: R16.1 XMC1.23 | length 4
  Top Layer w0.762: XMC1.23 72.263,44.323 73.533,45.593 R16.1
NetR20_1: R20.1 U2.4 | length 13.4
  Top Layer w0.635: U2.4@24.141,67.945 23.183,67.945 22.294,67.056 22.294,61.468 23.326,60.436 R20.1@27.501,60.436
NetR34_1: R34.1 U2.11 | length 10.6
  Top Layer w0.635: U2.11 30.607,67.945 31.623,66.929 31.623,61.341 30.718,60.436 R34.1@29.591,60.436
NetR35_1: R35.1 U5.7 | length 3.9
  Top Layer w0.762: R35.1 32.893,32.766 34.163,31.496 U5.7
NetR37_2: R37.2 R38.1 | length 3.5
  Top Layer w1.016: R38.1 48.813,1.701 R37.2
NetR38_2: R38.2 R39.1 | length 2.8
  Top Layer w1.016: R39.1 48.035,7.874 R38.2
NetR39_2: R39.2 R40.1 | length 3.4
  Top Layer w1.016: R39.2 R40.1
NetR40_2: R40.2 R41.1 | length 3.4
  Top Layer w1.016: R40.2 R41.1
NetR42_1: R42.1 U4.4 | length 13.4
  Top Layer w0.635: U4.4 10.795,67.945 9.906,67.056 9.906,61.468 10.938,60.436 R42.1
NetR43_2: R43.2 R44.1 | length 3.5
  Top Layer w1.016: R44.1 31.75,5.08 R43.2
NetR44_2: R44.2 R45.1 | length 2.8
  Top Layer w1.016: R44.2 31.988,7.096 32.766,7.874 R45.1
NetR45_2: R45.2 R46.1 | length 3.4
  Top Layer w1.016: R45.2 R46.1
NetR46_2: R46.2 R47.1 | length 3.4
  Top Layer w1.016: R46.2 34.163,14.716 R47.1
NetR48_1: R48.1 U4.11 | length 10.6
  Top Layer w0.635: U4.11 18.415,67.945 19.431,66.929 19.431,61.341 18.526,60.436 R48.1
NetR49_1: R49.1 U8.7 | length 5.9
  Top Layer w0.762: U8.7 60.198,31.242 61.214,32.258 63.119,32.258 63.745,32.884 R49.1
NetR50_1: R50.1 U9.7 | length 3.7
  Top Layer w0.762: R50.1 8.255,32.512 9.017,31.75 U9.7
NetR53_2: R53.2 R54.1 | length 3.2
  Top Layer w1.016: R53.2@74.787,1.524 75.184,1.921 R54.1@75.184,4.522
NetR54_2: R54.2 R55.1 | length 3
  Top Layer w1.016: R55.1 73.959,7.747 R54.2@75.143,6.563
NetR55_2: R55.2 R56.1 | length 3.4
  Top Layer w1.016: R55.2@70.247,7.747 R56.1@70.247,11.176
NetR56_2: R56.2 R57.1 | length 2.4
  Top Layer w1.016: R56.2@72.771,11.7 R57.1@72.771,14.081
NetR58_2: R58.2 R59.1 | length 3.5
  Top Layer w1.016: R59.1 24.126,1.574 R58.2
NetR59_2: R59.2 R60.1 | length 2.9
  Top Layer w1.016: R60.1 23.349,7.747 R59.2
NetR60_2: R60.2 R61.1 | length 3.7
  Top Layer w1.016: R60.2 R61.1
NetR61_2: R61.2 R62.1 | length 3
  Top Layer w1.016: R61.2 R62.1
NetR63_2: R63.2 R64.1 | length 3.4
  Top Layer w1.016: R63.2@57.293,1.524 R64.1@57.293,4.953
NetR64_2: R64.2 R65.1 | length 2.4
  Top Layer w1.016: R64.2@57.658,6.969 57.912,6.969 58.69,7.747 R65.1
NetR65_2: R65.2 R66.1 | length 3.4
  Top Layer w1.016: R65.2@62.087,7.747 R66.1@62.087,11.176
NetR66_2: R66.2 R67.1 | length 2.9
  Top Layer w1.016: R66.2@59.817,11.446 R67.1@59.817,14.319
NetR68_2: R68.2 R69.1 | length 3.5
  Top Layer w1.016: R68.2 6.489,4.919 R69.1
NetR69_2: R69.2 R70.1 | length 2.8
  Top Layer w1.016: R69.2 6.715,6.969 7.493,7.747 R70.1
NetR70_2: R70.2 R71.1 | length 3.7
  Top Layer w1.016: R70.2 R71.1
NetR71_2: R71.2 R72.1 | length 3
  Top Layer w1.016: R71.2 R72.1
NetU1_3: U1.3 U1.5 U1.6 U1.8 | length 12.5
  Top Layer w0.508: U1.6@35.615,65.608 U1.5@35.615,66.878 ; 35.615,66.269 37.4,66.269 ; U1.3@35.615,69.418 36.968,69.418 37.4,68.986 37.4,65.735 38.797,64.338 U1.8@41.065,64.338
NetU1_10: U1.10 U1.12 U1.13 | length 6.2
  Top Layer w0.508: U1.10@41.065,66.878 40.194,66.878 39.584,67.488 39.584,69.113 39.889,69.418 41.065,69.418 U1.13@41.065,70.688
NetU2_3: U2.3 U2.5 U2.6 U2.8 | length 12.5
  Top Layer w0.508: U2.6@23.862,65.481 U2.5@23.862,66.751 ; 23.862,66.142 25.647,66.142 ; U2.3@23.862,69.291 25.215,69.291 25.647,68.859 25.647,65.608 27.044,64.211 U2.8@29.312,64.211
NetU2_10: U2.10 U2.12 U2.13 | length 6.2
  Top Layer w0.508: U2.10@29.312,66.751 28.441,66.751 27.831,67.361 27.831,68.986 28.136,69.291 29.312,69.291 U2.13@29.312,70.561
NetU4_3: U4.3 U4.5 U4.6 U4.8 | length 12.5
  Top Layer w0.508: U4.6@11.67,65.481 U4.5@11.67,66.751 ; 11.67,66.142 13.455,66.142 ; U4.3@11.67,69.291 13.023,69.291 13.455,68.859 13.455,65.608 14.852,64.211 U4.8@17.12,64.211
NetU4_10: U4.10 U4.12 U4.13 | length 6.2
  Top Layer w0.508: U4.10@17.12,66.751 16.249,66.751 15.639,67.361 15.639,68.986 15.944,69.291 17.12,69.291 U4.13@17.12,70.561
PWM_FAN: P2.5 P7.4 XMC1.50 | length 61
  Top Layer w0.508: P2.5 XMC1.50 51.943,84.074 52.513,84.644 72.76,84.644 73.521,85.405 73.521,86.856 74.803,88.138 78.232,88.138 79.121,87.249 79.121,67.691 81.28,65.532 81.28,63.5 P7.4
PWM_U: R11.2 U4.1
PWM_V: R7.2 U2.1
PWM_W: R8.1 U1.1 | length 4.6
  Top Layer w0.508: U1.1 37.338,71.882 38.227,72.771 R8.1
Relay_1: P8.7 R15.2 | length 43.1
  Top Layer w0.762: R15.2 v2(71.247,50.038)
  Bottom Layer w0.762: v2(71.247,50.038) 71.247,51.181 74.041,53.975 89.662,53.975 94.361,58.674 94.361,66.167 93.218,67.31 91.313,67.31 90.17,66.167 P8.7
Relay_2: P8.6 R16.2 | length 47.5
  Top Layer w0.762: R16.2 v2(73.533,50.038)
  Bottom Layer w0.762: v2(73.533,50.038) 73.533,51.689 74.422,52.578 89.702,52.578 95.377,58.253 95.377,66.588 93.512,68.453 89.154,68.453 87.63,66.929 P8.6
TACH_FAN: P7.3 XMC1.18 | length 26.4
  Top Layer w0.508: XMC1.18 73.521,41.644 73.521,43.676 75.692,45.847 v2(75.692,60.198)
  Bottom Layer w0.762: v2(75.692,60.198) 77.978,60.198 P7.3
temp: P7.6 R24.2 | length 36.4
  Top Layer w0.762: R24.2 78.629,33.671 79.375,34.417 v2(79.375,56.896)
  Bottom Layer w0.762: v2(79.375,56.896) 84.836,56.896 87.63,59.69 P7.6
temp_xmc: R24.1 R27.2 XMC1.12 | length 23.2
  Top Layer w0.762: XMC1.12 57.023,39.37 58.039,38.354 71.501,38.354 74.184,35.671 R24.1
V_DC: P7.7 R17.2 | length 46.3
  Top Layer w0.762: R17.2 71.374,32.766 72.009,32.131 78.994,32.131 80.899,34.036 v2(80.899,55.372)
  Bottom Layer w0.762: v2(80.899,55.372) 85.725,55.372 90.17,59.817 P7.7
v_dc_xmc: R17.1 R21.2 XMC1.11 | length 20.2
  Top Layer w0.762: XMC1.11 54.483,39.116 56.261,37.338 68.199,37.338 68.834,36.703 R21.2 R17.1
vabc_0: R26.1 R29.2 XMC1.8 | length 37.1
  Top Layer w0.762: R26.1 R29.2 17.161,33.671 21.082,37.592 45.212,37.592 46.863,39.243 XMC1.8
vabc_1: R19.1 R23.2 XMC1.9 | length 15.3
  Top Layer w0.762: R19.1 R23.2 41.944,33.671 44.087,35.814 46.482,35.814 49.403,38.735 XMC1.9
vabc_2: R31.1 R33.2 XMC1.10 | length 13
  Top Layer w0.762: XMC1.10 51.943,38.735 57.007,33.671 R33.2 R31.1
Vamp1: C14.1 R51.1 R57.2 U8.3 | length 14
  Top Layer w0.635: U8.3 61.468,18.288 62.103,17.653 63.373,17.653 64.135,18.415 66.421,18.415 66.929,17.907 66.929,16.653 R51.1@66.863,16.587
  Top Layer w1.016: C14.1@67.244,14.605 R51.1@67.244,16.714 ; C14.1@67.371,14.732 R57.2@70.501,14.732
Vamp2: C14.2 R51.2 R67.2 U8.2 | length 11.2
  Top Layer w0.635: U8.2 60.198,17.653 62.214,15.637 R67.2@62.214,14.378
  Top Layer w1.016: R67.2@61.463,14.732 C14.2@64.693,14.732 ; C14.2@64.72,14.705 R51.2@64.72,16.814
Vamp12: C16.1 R52.1 R62.2 U9.3 | length 14.8
  Top Layer w0.635: U9.3 10.287,18.161 10.922,17.526 12.446,17.526 13.081,18.161 15.875,18.161 16.256,17.78 16.256,16.526 R52.1 R52.1@16.19,16.46
  Top Layer w1.016: R52.1@16.19,16.46 C16.1 19.547,14.351 R62.2
Vamp13: C6.1 R36.1 R41.2 U5.3 | length 14
  Top Layer w0.635: U5.3@35.433,19.685 35.433,18.542 36.068,17.907 37.338,17.907 38.1,18.669 40.386,18.669 40.894,18.161 40.894,16.907 R36.1@40.828,16.841
  Top Layer w1.016: C6.1@40.939,14.732 R36.1@40.939,16.841 ; C6.1 R41.2@44.196,14.859
Vamp22: C16.2 R52.2 R72.2 U9.2 | length 11.2
  Top Layer w0.635: U9.2 9.017,17.653 11.033,15.637 R72.2
  Top Layer w1.016: R72.2 C16.2@14.263,14.378 ; C16.2 R52.2@14.29,16.46
Vamp23: C6.2 R36.2 R47.2 U5.2 | length 11.2
  Top Layer w0.635: U5.2 34.163,17.653 36.179,15.637 R47.2@36.179,14.378
  Top Layer w1.016: R47.2@35.936,14.859 C6.2 ; C6.2@39.193,14.832 R36.2@39.193,16.941
Vdd1: C9.2 C10.2 U6.4 U8.1 | length 18.2
  Top Layer w0.762: C10.2 v3(58.613,18.354) 58.801,18.542 U8.1@58.801,19.431 ; U6.4 72.024,18.049 72.644,18.669 C9.2
  Bottom Layer w0.762: v3(58.613,18.354) 70.053,18.354 U6.4
Vdd2: C11.2 C12.2 U7.4 U9.1 | length 18.5
  Top Layer w0.762: C12.2 v3(7.559,18.354) 7.747,18.542 U9.1 ; U7.4 20.716,18.049 21.463,18.796 C11.2
  Bottom Layer w0.762: v3(7.559,18.354) 18.999,18.354 U7.4
Vdd3: C4.2 C5.2 U3.4 U5.1 | length 19
  Top Layer w0.762: C4.2 v3(32.451,18.354) 32.893,18.796 U5.1 ; U3.4 46.243,18.176 46.847,18.78 C5.2
  Bottom Layer w0.762: v3(32.451,18.354) 43.891,18.354 U3.4@44.196,18.049
Vout1: C7.2 R19.2 R35.2 | length 4.9
  Top Layer w0.762: R35.2 R19.2
Vout2: C17.2 R26.2 R50.2 | length 4.9
  Top Layer w1.016: R50.2 R26.2
Vout3: C15.2 R31.2 R49.2 | length 5.1
  Top Layer w0.762: R31.2 61.295,35.585 C15.2
pads on no net: P7.5 XMC1.4 XMC1.5 XMC1.6 XMC1.7 XMC1.13 XMC1.14 XMC1.15 XMC1.17 XMC1.19 XMC1.27 XMC1.35 XMC1.37 XMC1.38 XMC1.57 XMC1.59 XMC1.62 XMC1.67 XMC1.76 XMC1.77 XMC1.78

## Polygon pours and split planes (outlines as drawn)
3V3GND on Bottom Layer "Top Layer-No Net" (solid, remove dead copper, pour order 10): 6.985,27.305 -0.635,34.925 -0.635,89.027 6.477,96.139 89.916,96.139 97.155,88.9 97.155,4.318 92.329,-0.508 83.312,-0.508 79.756,3.048 79.756,25.527 78.105,27.305
3V3GND on Top Layer "Top Layer-No Net" (solid, remove dead copper, pour order 12): 6.985,27.305 -0.635,34.925 -0.635,89.027 6.477,96.139 89.916,96.139 97.155,88.9 97.155,4.318 92.329,-0.508 83.312,-0.508 79.756,3.048 79.756,25.527 78.105,27.305

## Other copper
Top Layer:
  rectangle net 3V3GND: 34.994,62.484 36.391,64.389
  rectangle net 3V3GND: 23.241,62.357 24.638,64.262
  rectangle net 3V3GND: 11.049,62.357 12.446,64.262
  rectangle net PWM_V: 23.241,71.755 24.638,73.914
  rectangle net PWM_U: 11.049,71.628 12.446,73.914
  rectangle net 5V: 54.991,29.464 58.928,30.988
  rectangle net 5V: 29.464,29.464 32.893,30.988
  rectangle net 5V: 4.318,29.464 7.874,30.988

## Silkscreen, mask and mechanical layers (free items; w line width, h text height)
Top Overlay:
  text "controlo REV4.0 / v.morais@fe.up.pt" at 95.123,3.683 h1.02 r90
  text "TOP" at 87.376,-0.762 h0.76
Bottom Overlay:
  text "BOT" at 91.313,-0.762 h0.76